# EAGLE board scoreboard_b2_v3 (EAGLE 9.0.1)
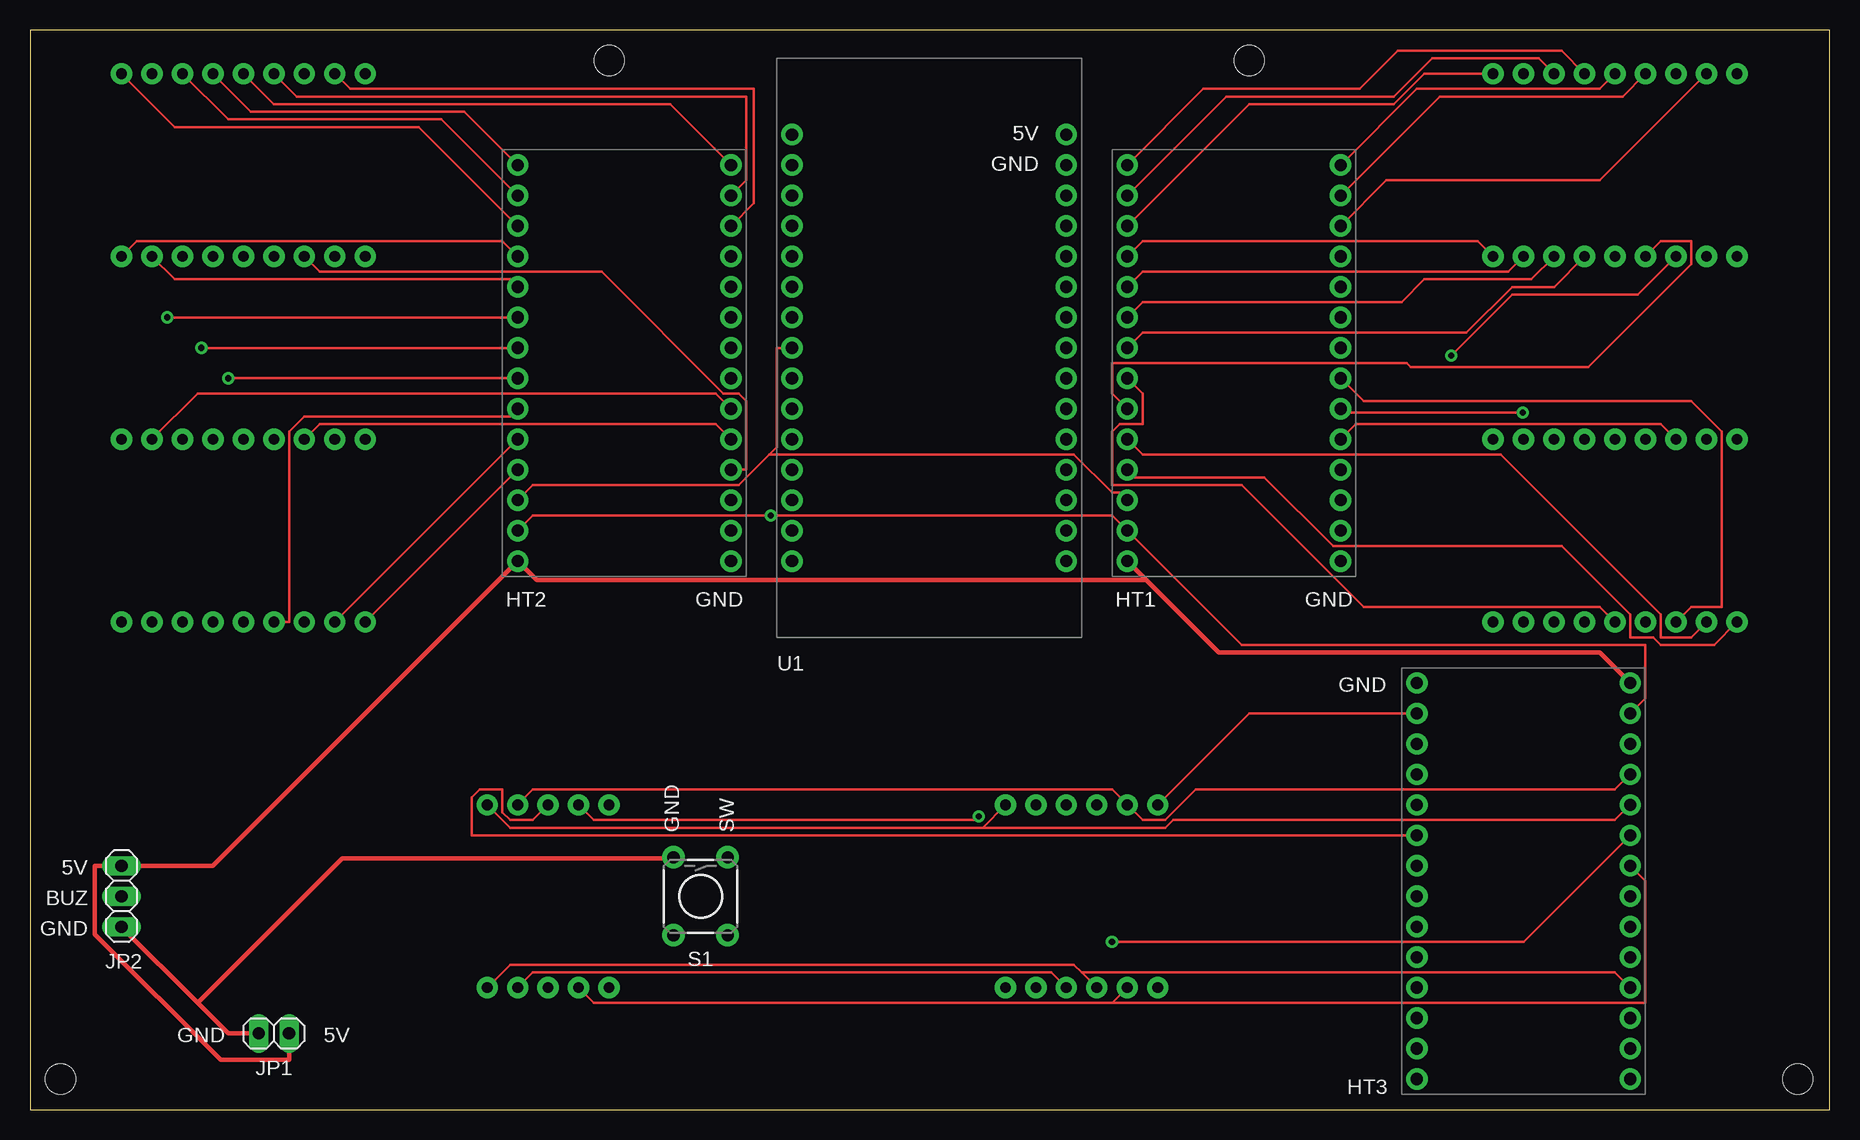
[diagram p0: board, top side]
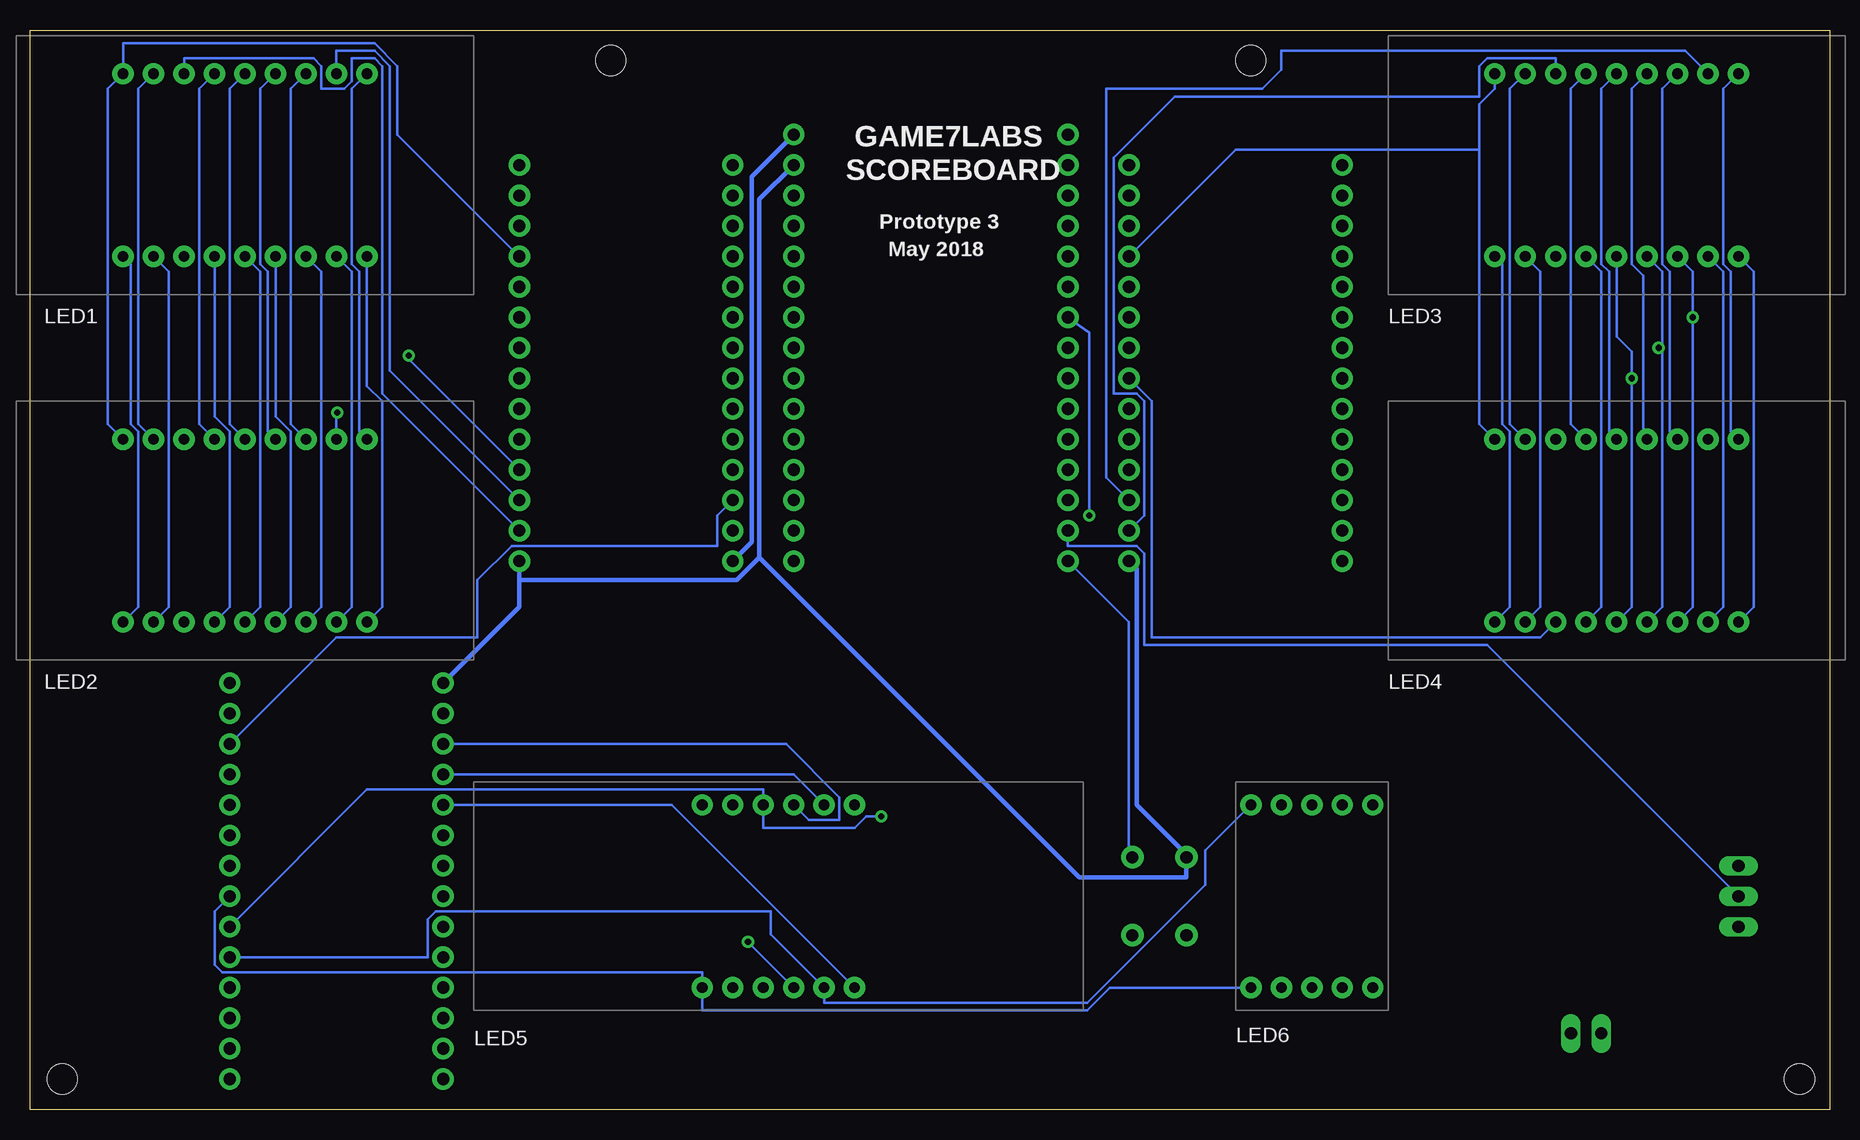
[diagram p1: board, bottom side, seen from below]

Size 150 x 90 mm. Coordinates in mm from the lower left corner, seen from the top.
Outline: 0,0 150,0 150,90 0,90 0,0
Copper layers (1*16): Top 0.035mm / dielectric 1.5mm / Bottom 0.035mm
Design rules "SparkFun": minimum track width 8mil, minimum drill 20mil, track to track 8mil, track to pad 8mil, pad to pad 8mil, via to via 8mil, smd to smd 8mil, copper to edge 10mil, drill to drill 8mil, minimum pad ring 12mil, minimum via ring 10mil, stop-mask expansion 4mil, vias tented up to drill 25mil, thermal gap 10mil
Net classes: 1 thick: width 0.381 mm, drill 0.254 mm, clearance 0.254 mm to class 0, clearance 0.254 mm
Holes 2.5 mm at 2.54,2.54 147.32,2.54 48.26,87.46 101.6,87.46

## Footprints (pad centres in the part's own frame; a part is rotated, then mirrored left to right if it is on the bottom)
HT16K33 = drill 1.016 pad 1.778: A0 17.78,25.4; A1 17.78,22.86; A2 17.78,20.32; A3 17.78,17.78; A4 17.78,15.24; A5 17.78,12.7; A6 17.78,10.16; A7 17.78,7.62; A8 17.78,5.08; A9 17.78,2.54; A10 17.78,0; A11 0,0; A12 0,2.54; A13 0,5.08; A14 0,7.62; A15 0,10.16; C0 0,30.48; C1 0,27.94; C2 0,25.4; C3 0,22.86; C4 0,20.32; C5 0,17.78; C6 0,15.24; C7 0,12.7; GND 0,33.02; SCL 17.78,27.94; SDA 17.78,30.48; VDD 17.78,33.02
1X02 = drill 1.016 long: 1 -1.27,0; 2 1.27,0
1X03 = drill 1.016 long: 1 -2.54,0; 2 0,0; 3 2.54,0
TCD00A3-A = drill 0.889 pad 1.778: P$1 0,0; P$2 2.54,0; P$3 5.08,0; P$4 7.62,0; P$5 10.16,0; P$6 12.7,0; P$7 15.24,0; P$8 17.78,0; P$9 20.32,0; P$10 20.32,15.24; P$11 17.78,15.24; P$12 15.24,15.24; P$13 12.7,15.24; P$14 10.16,15.24; P$15 7.62,15.24; P$16 5.08,15.24; P$17 2.54,15.24; P$18 0,15.24
FJ5462A = drill 0.889 pad 1.778: P$1 0,0; P$2 2.54,0; P$3 5.08,0; P$4 7.62,0; P$5 10.16,0; P$6 12.7,0; P$7 12.7,15.24; P$8 10.16,15.24; P$9 7.62,15.24; P$10 5.08,15.24; P$11 2.54,15.24; P$12 0,15.24
LDS-5161AX = drill 0.889 pad 1.778: P$1 0,0; P$2 2.54,0; P$3 5.08,0; P$4 7.62,0; P$5 10.16,0; P$6 10.16,15.24; P$7 7.62,15.24; P$8 5.08,15.24; P$9 2.54,15.24; P$10 0,15.24
TACTILE_SWITCH_PTH_6.0MM = drill 1.016 pad 1.88: 1 -3.251,2.261; 2 3.251,2.261; 3 -3.251,-2.261; 4 3.251,-2.261
NODEMCU_V2 = drill 1.016 pad 1.778: 3V3@1 0,-25.4; 3V3@2 22.86,-35.56; 3V3@3 22.86,-12.7; A0 0,0; CLK 0,-20.32; CMD 0,-15.24; D0 22.86,0; D1 22.86,-2.54; D2 22.86,-5.08; D3 22.86,-7.62; D4 22.86,-10.16; D5 22.86,-17.78; D6 22.86,-20.32; D7 22.86,-22.86; D8 22.86,-25.4; D9 22.86,-27.94; D10 22.86,-30.48; EN 0,-27.94; GND@1 0,-22.86; GND@2 0,-33.02; GND@3 22.86,-33.02; GND@4 22.86,-15.24; RST 0,-30.48; RSV@1 0,-2.54; RSV@2 0,-5.08; SD0 0,-17.78; SD1 0,-12.7; SD2 0,-10.16; SD3 0,-7.62; VIN 0,-35.56

## Placement (x,y rotation side)
HT1  HT16K33  [HT16K33]  109.22,78.74 180 top
HT2  HT16K33  [HT16K33]  58.42,78.74 180 top
HT3  HT16K33  [HT16K33]  115.57,2.54 0 top
JP1  HEADER  [1X02]  20.32,6.35 0 top
JP2  HEADER  [1X03]  7.62,17.78 270 top
LED1  TCD00A3-A  [TCD00A3-A]  142.24,71.12 0 bottom
LED2  TCD00A3-A  [TCD00A3-A]  142.24,40.64 0 bottom
LED3  TCD00A3-A  [TCD00A3-A]  27.94,71.12 0 bottom
LED4  TCD00A3-A  [TCD00A3-A]  27.94,40.64 0 bottom
LED5  FJ5462A  [FJ5462A]  93.98,10.16 0 bottom
LED6  LDS-5161AX  [LDS-5161AX]  48.26,10.16 0 bottom
S1  MOMENTARY-SWITCH-SPST-PTH-6.0MM  [TACTILE_SWITCH_PTH_6.0MM]  55.88,17.78 270 top
U1  NODEMCU_V2  [NODEMCU_V2]  86.36,45.72 180 top

## Library data of the parts
HT1-HT3 LED1-LED6 U1 = ScoreBoard
JP1 JP2 = pinhead
S1 = SparkFun-Switches; PROD_ID: SWCH-08441; SF_SKU: COM-00097

## Nets
+5V [thick]: HT1.VDD HT2.VDD HT3.VDD JP1.2 JP2.1 U1.VIN
BUZ: JP2.2 U1.D1
GND [thick]: HT1.GND HT2.GND HT3.GND JP1.1 JP2.3 S1.3 U1.GND@2
HT1_A0: HT1.A0 LED1.P$1 LED2.P$1
HT1_A1: HT1.A1 LED1.P$2 LED2.P$2
HT1_A2: HT1.A2 LED1.P$4 LED2.P$4
HT1_A3: HT1.A3 LED1.P$5 LED2.P$5
HT1_A4: HT1.A4 LED1.P$6 LED2.P$6
HT1_A5: HT1.A5 LED1.P$7 LED2.P$7
HT1_A6: HT1.A6 LED1.P$8 LED2.P$8
HT1_A7: HT1.A7 LED1.P$9 LED2.P$9
HT1_A8: HT1.A8 LED1.P$10 LED2.P$10
HT1_A9: HT1.A9 LED1.P$12 LED2.P$12
HT1_A10: HT1.A10 LED1.P$13 LED2.P$13
HT1_A11: HT1.A11 LED1.P$14 LED2.P$14
HT1_A12: HT1.A12 LED1.P$15 LED2.P$15
HT1_A13: HT1.A13 LED1.P$17 LED2.P$17
HT1_A14: HT1.A14 LED1.P$18 LED2.P$18
HT1_C0: HT1.C0 LED1.P$16
HT1_C1: HT1.C1 LED1.P$11
HT1_C2: HT1.C2 LED1.P$3
HT1_C3: HT1.C3 LED2.P$16
HT1_C4: HT1.C4 LED2.P$11
HT1_C5: HT1.C5 LED2.P$3
HT2_A0: HT2.A0 LED3.P$1 LED4.P$1
HT2_A1: HT2.A1 LED3.P$2 LED4.P$2
HT2_A2: HT2.A2 LED3.P$4 LED4.P$4
HT2_A3: HT2.A3 LED3.P$5 LED4.P$5
HT2_A4: HT2.A4 LED3.P$6 LED4.P$6
HT2_A5: HT2.A5 LED3.P$7 LED4.P$7
HT2_A6: HT2.A6 LED3.P$8 LED4.P$8
HT2_A7: HT2.A7 LED3.P$9 LED4.P$9
HT2_A8: HT2.A8 LED3.P$10 LED4.P$10
HT2_A9: HT2.A9 LED3.P$12 LED4.P$12
HT2_A10: HT2.A10 LED3.P$13 LED4.P$13
HT2_A11: HT2.A11 LED3.P$14 LED4.P$14
HT2_A12: HT2.A12 LED3.P$15 LED4.P$15
HT2_A13: HT2.A13 LED3.P$17 LED4.P$17
HT2_A14: HT2.A14 LED3.P$18 LED4.P$18
HT2_C0: HT2.C0 LED3.P$16
HT2_C1: HT2.C1 LED3.P$11
HT2_C2: HT2.C2 LED3.P$3
HT2_C3: HT2.C3 LED4.P$16
HT2_C4: HT2.C4 LED4.P$11
HT2_C5: HT2.C5 LED4.P$3
HT3_A0: HT3.A0 LED5.P$11 LED6.P$7
HT3_A1: HT3.A1 LED5.P$7 LED6.P$6
HT3_A2: HT3.A2 LED5.P$4 LED6.P$4
HT3_A3: HT3.A3 LED5.P$2 LED6.P$2
HT3_A4: HT3.A4 LED5.P$1 LED6.P$1
HT3_A5: HT3.A5 LED5.P$10 LED6.P$9
HT3_A6: HT3.A6 LED5.P$5 LED6.P$10
HT3_A7: HT3.A7 LED5.P$3 LED6.P$5
HT3_C0: HT3.C0 LED5.P$12
HT3_C1: HT3.C1 LED5.P$9
HT3_C2: HT3.C2 LED5.P$8
HT3_C3: HT3.C3 LED5.P$6
HT3_C4: HT3.C4 LED6.P$8
SCL: HT1.SCL HT2.SCL HT3.SCL U1.D5
SDA: HT1.SDA HT2.SDA HT3.SDA U1.D6
SW: S1.1 U1.D0

## Tracks (layer width: path | path; a pad name or v marks a point on that pad's centre or on a via)
+5V
  Top 0.381: JP1.2 21.59,4.13 15.88,4.13 5.4,14.61 5.4,20.32 JP2.1 15.24,20.32 HT2.VDD 42.23,44.13 93.03,44.13 | HT3.VDD 130.81,38.1 99.06,38.1 93.03,44.13 | HT1.VDD 93.03,44.13
  Bottom 0.381: U1.VIN 89.85,77.79 89.85,47.31 HT1.VDD
BUZ
  Bottom 0.203: JP2.2 28.57,38.73 57.15,38.73 57.15,46.35 57.78,46.99 63.5,46.99 U1.D1
GND
  Top 0.381: 13.97,8.89 16.51,6.35 JP1.1 | 13.97,8.89 JP2.3 | 13.97,8.89 26.04,20.95 53.34,20.95 S1.3
  Bottom 0.381: HT3.GND 109.22,41.91 109.22,44.13 | HT1.GND 109.22,44.13 | U1.GND@2 89.22,75.88 89.22,46.04 | 89.22,46.04 91.12,44.13 109.22,44.13 | HT2.GND 57.78,45.09 57.78,25.4 53.66,21.27 S1.3 53.66,20.95 53.66,19.37 62.55,19.37 89.22,46.04
HT1_A0
  Top 0.203: HT1.A0 92.08,52.7 102.87,52.7 108.58,46.99 127.64,46.99 133.35,41.27 133.35,39.37 135.25,39.37 135.89,38.73 140.34,38.73 LED2.P$1
  Bottom 0.203: LED1.P$1 141.6,70.48 141.6,57.15 140.97,56.52 140.97,41.91 LED2.P$1
HT1_A1
  Top 0.203: HT1.A1 92.71,54.61 122.56,54.61 135.89,41.27 135.89,39.37 138.43,39.37 LED2.P$2
  Bottom 0.203: LED1.P$2 138.43,69.85 138.43,41.91 LED2.P$2
HT1_A2
  Top 0.203: HT1.A2 90.17,59.69 90.17,62.23 114.75,62.23 115.06,61.91 129.86,61.91 138.43,70.48 138.43,72.39 135.89,72.39 LED1.P$4
  Bottom 0.203: LED2.P$4 133.35,41.91 133.35,56.52 134.62,57.78 LED1.P$4
HT1_A3
  Top 0.203: HT1.A3 92.71,59.69 92.71,57.15 90.81,57.15 90.17,56.52 90.17,52.07 100.97,52.07 111.12,41.91 130.81,41.91 LED2.P$5
  Bottom 0.203: LED1.P$5 130.81,69.85 130.81,41.91 LED2.P$5
HT1_A4
  Top 0.203: HT1.A4 92.71,64.77 119.7,64.77 123.51,68.58 127,68.58 LED1.P$6
  Bottom 0.203: LED2.P$6 128.27,41.91 128.27,56.52 129.54,57.78 LED1.P$6
HT1_A5
  Top 0.203: HT1.A5 92.71,67.31 114.3,67.31 116.2,69.22 125.09,69.22 LED1.P$7
  Bottom 0.203: LED2.P$7 125.73,41.91 125.73,69.85 LED1.P$7
HT1_A6
  Top 0.203: HT1.A6 92.71,69.85 123.19,69.85 LED1.P$8
  Bottom 0.203: LED2.P$8 123.19,41.91 123.19,69.85 LED1.P$8
HT1_A7
  Top 0.203: HT1.A7 92.71,72.39 120.65,72.39 LED1.P$9
  Bottom 0.203: LED2.P$9 120.65,41.91 120.65,59.05 121.92,60.33 LED1.P$9
HT1_A8
  Top 0.203: HT1.A8 101.6,83.82 113.67,83.82 116.2,86.36 LED1.P$10
  Bottom 0.203: LED2.P$10 122.56,56.52 122.56,69.85 123.19,70.48 123.19,85.09 LED1.P$10
HT1_A9
  Top 0.203: HT1.A9 99.69,84.45 113.67,84.45 116.84,87.63 125.73,87.63 LED1.P$12
  Bottom 0.203: LED2.P$12 128.27,57.15 128.27,85.09 LED1.P$12
HT1_A10
  Top 0.203: HT1.A10 97.79,85.09 110.81,85.09 113.98,88.27 127.64,88.27 LED1.P$13
  Bottom 0.203: LED2.P$13 130.18,56.52 130.18,69.85 130.81,70.48 130.81,85.09 LED1.P$13
HT1_A11
  Top 0.203: HT1.A11 115.57,85.09 130.81,85.09 LED1.P$14
  Bottom 0.203: LED2.P$14 133.35,57.15 133.35,85.09 LED1.P$14
HT1_A12
  Top 0.203: HT1.A12 117.47,84.45 132.72,84.45 LED1.P$15
  Bottom 0.203: LED2.P$15 135.89,57.15 135.89,85.09 LED1.P$15
HT1_A13
  Top 0.203: HT1.A13 113.03,77.47 130.81,77.47 LED1.P$17
  Bottom 0.203: LED2.P$17 140.97,57.15 140.97,85.09 LED1.P$17
HT1_A14
  Bottom 0.203: HT1.A14 119.38,81.28 119.38,87 121.28,88.9 142.24,88.9 LED1.P$18 143.51,85.09 143.51,57.15 LED2.P$18
HT1_C0
  Bottom 0.203: HT1.C0 120.65,59.69 120.65,87 121.28,87.63 123.19,87.63 123.19,85.72 123.83,85.09 125.73,85.09 125.73,87 126.36,87.63 137.16,87.63 LED1.P$16
HT1_C1
  Bottom 0.203: HT1.C1 120.02,61.59 120.02,87 121.28,88.27 124.46,88.27 LED1.P$11
HT1_C2  (via drill 0.51)
  Top 0.203: v118.43,62.87 123.51,67.94 133.99,67.94 LED1.P$3
  Bottom 0.203: HT1.C2 118.43,62.55 v118.43,62.87
HT1_C3
  Top 0.203: HT1.C3 110.49,57.15 135.89,57.15 LED2.P$16
HT1_C4  (via drill 0.51)
  Top 0.203: HT1.C4 109.54,58.1 v124.4,58.1
  Bottom 0.203: v124.4,58.1 124.46,58.04 LED2.P$11
HT1_C5
  Top 0.203: HT1.C5 111.12,59.05 138.43,59.05 140.97,56.52 140.97,41.91 138.43,41.91 LED2.P$3
HT2_A0
  Top 0.203: HT2.A0 LED4.P$1
  Bottom 0.203: LED3.P$1 27.3,70.48 27.3,57.15 26.67,56.52 26.67,41.91 LED4.P$1
HT2_A1
  Top 0.203: HT2.A1 LED4.P$2
  Bottom 0.203: LED3.P$2 24.13,69.85 24.13,41.91 LED4.P$2
HT2_A2
  Top 0.203: HT2.A2 40.01,57.78 22.86,57.78 21.59,56.52 21.59,40.64 LED4.P$4
  Bottom 0.203: LED4.P$4 19.05,41.91 19.05,69.85 LED3.P$4
HT2_A3  (via drill 0.51)
  Top 0.203: v16.51,60.96 HT2.A3
  Bottom 0.203: LED4.P$5 16.51,41.91 v16.51,60.96 16.51,63.18 17.78,64.45 LED3.P$5
HT2_A4  (via drill 0.51)
  Top 0.203: v14.29,63.5 HT2.A4
  Bottom 0.203: LED4.P$6 13.97,41.91 13.97,63.5 | 13.97,63.5 13.97,69.85 LED3.P$6 | 13.97,63.5 v14.29,63.5
HT2_A5  (via drill 0.51)
  Top 0.203: v11.43,66.04 HT2.A5
  Bottom 0.203: LED4.P$7 11.43,41.91 v11.43,66.04 11.43,69.85 LED3.P$7
HT2_A6
  Top 0.203: HT2.A6 40.01,69.22 12.06,69.22 LED3.P$8
  Bottom 0.203: LED4.P$8 8.89,41.91 8.89,69.85 LED3.P$8
HT2_A7
  Top 0.203: HT2.A7 39.37,72.39 8.89,72.39 LED3.P$9
  Bottom 0.203: LED4.P$9 6.35,41.91 6.35,69.85 LED3.P$9
HT2_A8
  Top 0.203: HT2.A8 32.38,81.92 12.06,81.92 LED3.P$10
  Bottom 0.203: LED4.P$10 8.26,56.52 8.26,69.85 8.89,70.48 8.89,85.09 LED3.P$10
HT2_A9
  Top 0.203: HT2.A9 34.29,82.55 16.51,82.55 LED3.P$12
  Bottom 0.203: LED4.P$12 13.34,56.52 13.34,69.85 13.97,70.48 13.97,85.09 LED3.P$12
HT2_A10
  Top 0.203: HT2.A10 36.2,83.19 18.41,83.19 LED3.P$13
  Bottom 0.203: LED4.P$13 15.56,56.2 15.56,69.53 16.51,70.48 16.51,85.09 LED3.P$13
HT2_A11
  Top 0.203: HT2.A11 53.34,83.82 20.32,83.82 LED3.P$14
  Bottom 0.203: LED4.P$14 18.41,56.52 18.41,69.85 19.05,70.48 19.05,85.09 LED3.P$14
HT2_A12
  Top 0.203: HT2.A12 59.69,77.47 59.69,84.45 22.23,84.45 LED3.P$15
  Bottom 0.203: LED4.P$15 21.59,57.15 21.59,85.09 LED3.P$15
HT2_A13
  Top 0.203: HT2.A13 60.33,75.56 60.33,85.09 26.67,85.09 LED3.P$17
  Bottom 0.203: LED4.P$17 26.67,57.15 26.67,85.09 LED3.P$17
HT2_A14
  Bottom 0.203: LED4.P$18 29.21,57.15 29.21,80.01 | 29.21,80.01 29.21,83.82 27.94,85.09 LED3.P$18 | HT2.A14 49.53,80.01 29.21,80.01
HT2_C0
  Bottom 0.203: HT2.C0 57.15,49.53 57.15,59.05 57.78,59.69 59.69,59.69 59.69,79.38 54.61,84.45 29.21,84.45 29.21,87 28.57,87.63 22.86,87.63 LED3.P$16
HT2_C1
  Bottom 0.203: LED3.P$11 12.06,88.27 45.72,88.27 45.72,86.68 47.31,85.09 60.33,85.09 60.33,52.7 HT2.C1
HT2_C2
  Top 0.203: LED3.P$3 24.13,69.85 47.62,69.85 57.78,59.69 59.05,59.69 59.69,59.05 59.69,53.34 HT2.C2
HT2_C3
  Top 0.203: LED4.P$16 24.13,57.15 57.15,57.15 HT2.C3
HT2_C4
  Top 0.203: LED4.P$11 13.97,59.69 57.15,59.69 HT2.C4
HT2_C5
  Bottom 0.203: LED4.P$3 24.13,39.37 56.52,39.37 56.52,59.05 HT2.C5
HT3_A0
  Top 0.203: LED6.P$7 41.91,26.67 90.17,26.67 LED5.P$11 92.71,24.13 94.61,24.13 97.16,26.67 132.08,26.67 HT3.A0
HT3_A1
  Top 0.203: LED6.P$6 40.01,23.5 79.38,23.5 | LED5.P$7 79.38,23.5 | HT3.A1 132.08,24.13 95.25,24.13 94.61,23.5 79.38,23.5
HT3_A2  (via drill 0.51)
  Top 0.203: LED6.P$4 41.91,11.43 85.09,11.43 LED5.P$4 | HT3.A2 124.46,13.97 v90.17,13.97
  Bottom 0.203: LED5.P$4 v90.17,13.97
HT3_A3
  Top 0.203: LED6.P$2 46.99,8.89 90.17,8.89 | LED5.P$2 90.17,8.89 | HT3.A3 134.62,19.05 134.62,8.89 90.17,8.89
HT3_A4
  Bottom 0.203: LED6.P$1 60.01,10.16 61.91,8.26 93.98,8.26 LED5.P$1 93.98,11.43 133.99,11.43 134.62,12.06 134.62,16.51 HT3.A4
HT3_A5  (via drill 0.51)
  Top 0.203: LED6.P$9 46.99,24.13 78.74,24.13 v79.06,24.45
  Bottom 0.203: v79.06,24.45 80.33,24.45 81.28,23.5 88.9,23.5 LED5.P$10 88.9,26.67 121.92,26.67 HT3.A5
HT3_A6
  Bottom 0.203: LED6.P$10 52.07,21.59 52.07,18.73 61.91,8.89 83.82,8.89 LED5.P$5 88.27,14.61 88.27,16.51 116.2,16.51 116.84,15.88 116.84,12.7 HT3.A6
HT3_A7
  Top 0.203: LED6.P$5 40.01,12.06 87,12.06 87.63,11.43 | LED5.P$3 87.63,11.43 | HT3.A7 132.08,11.43 87.63,11.43
HT3_C0
  Top 0.203: LED5.P$12 101.6,33.02 HT3.C0
HT3_C1
  Bottom 0.203: LED5.P$9 85.09,24.13 82.55,24.13 82.55,26.04 87,30.48 HT3.C1
HT3_C2
  Bottom 0.203: LED5.P$8 86.36,27.94 HT3.C2
HT3_C3
  Bottom 0.203: LED5.P$6 96.52,25.4 HT3.C3
HT3_C4
  Top 0.203: LED6.P$8 41.91,24.13 40.01,24.13 39.37,24.77 39.37,26.67 37.47,26.67 36.83,26.04 36.83,22.86 HT3.C4
SCL
  Top 0.203: HT2.SCL 41.91,52.07 59.05,52.07 61.59,54.61 | 61.59,54.61 62.23,55.24 62.23,63.5 U1.D5 | HT1.SCL 90.81,51.44 90.17,51.44 87,54.61 61.59,54.61
  Bottom 0.203: HT3.SCL 124.46,39.37 112.71,39.37 112.71,44.13 109.86,46.99 92.71,46.99 92.71,49.53 HT1.SCL
SDA  (via drill 0.51)
  Top 0.203: HT2.SDA 41.91,49.53 v61.72,49.53 90.17,49.53 HT1.SDA 100.97,38.73 134.62,38.73 134.62,34.29 HT3.SDA
  Bottom 0.203: U1.D6 61.72,64.77 v61.72,49.53
SW
  Bottom 0.203: U1.D0 58.42,40.64 58.42,21.27 S1.1

## Text on the board
tPlace: 5V | GND | GND | GND | GND | GND | SW | 5V | BUZ | GND | GND | 5V
bPlace: GAME7LABS | SCOREBOARD | Prototype 3 | May 2018